# Altium PCB Cap.PcbDoc
Units mil, origin at the board's own origin, x right, y up, seen from the top; angles counter-clockwise.
Board outline 3395.86 x 3474.6 mil, 2 copper layers (Top Layer, Bottom Layer); 4 components, 1 nets, 24 pads, 0 vias.
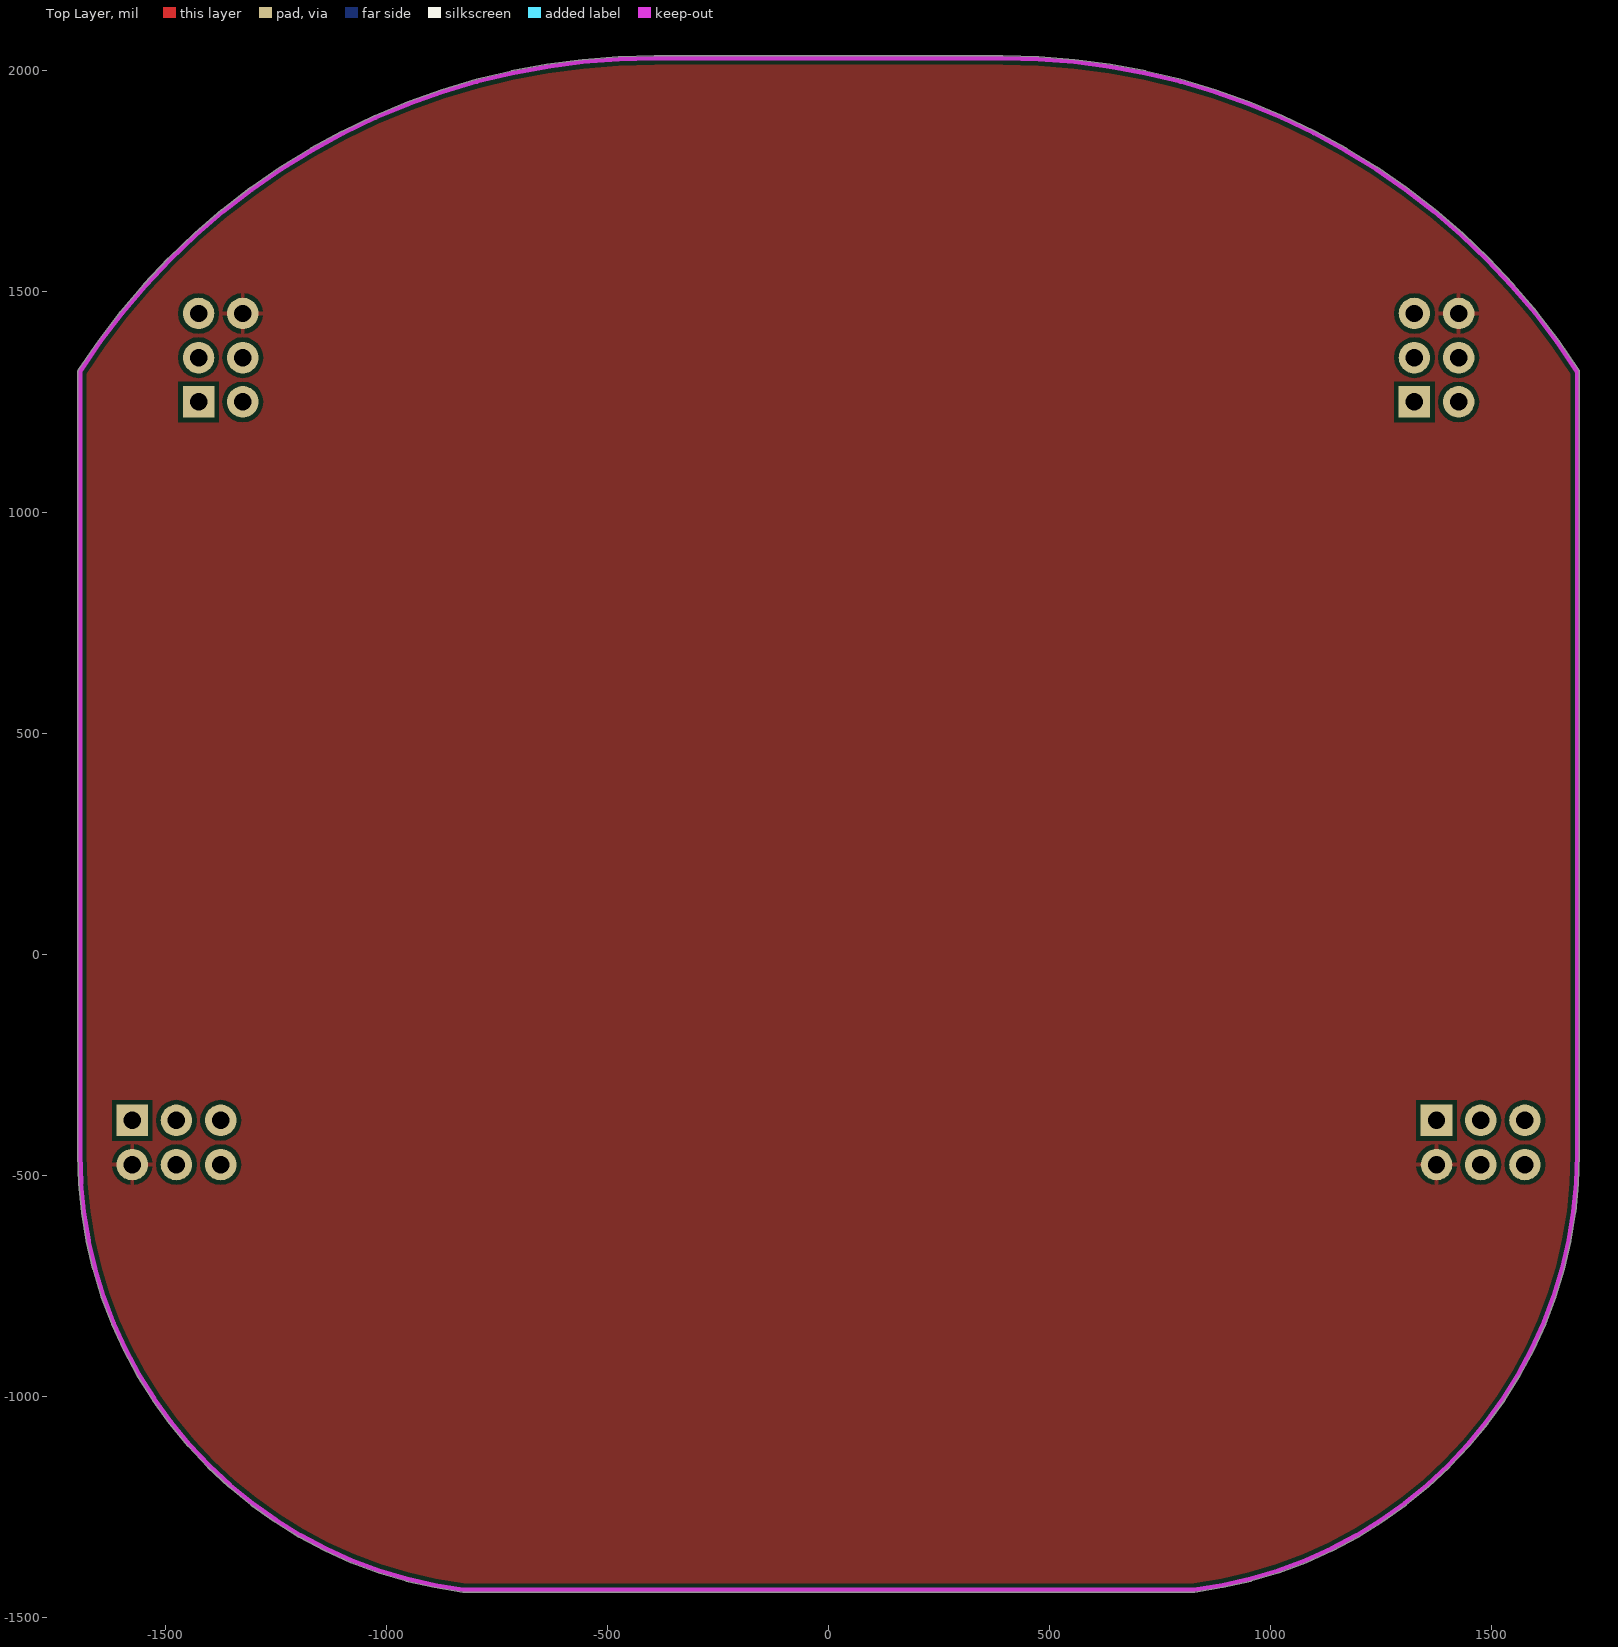
[diagram p0: Top Layer view]
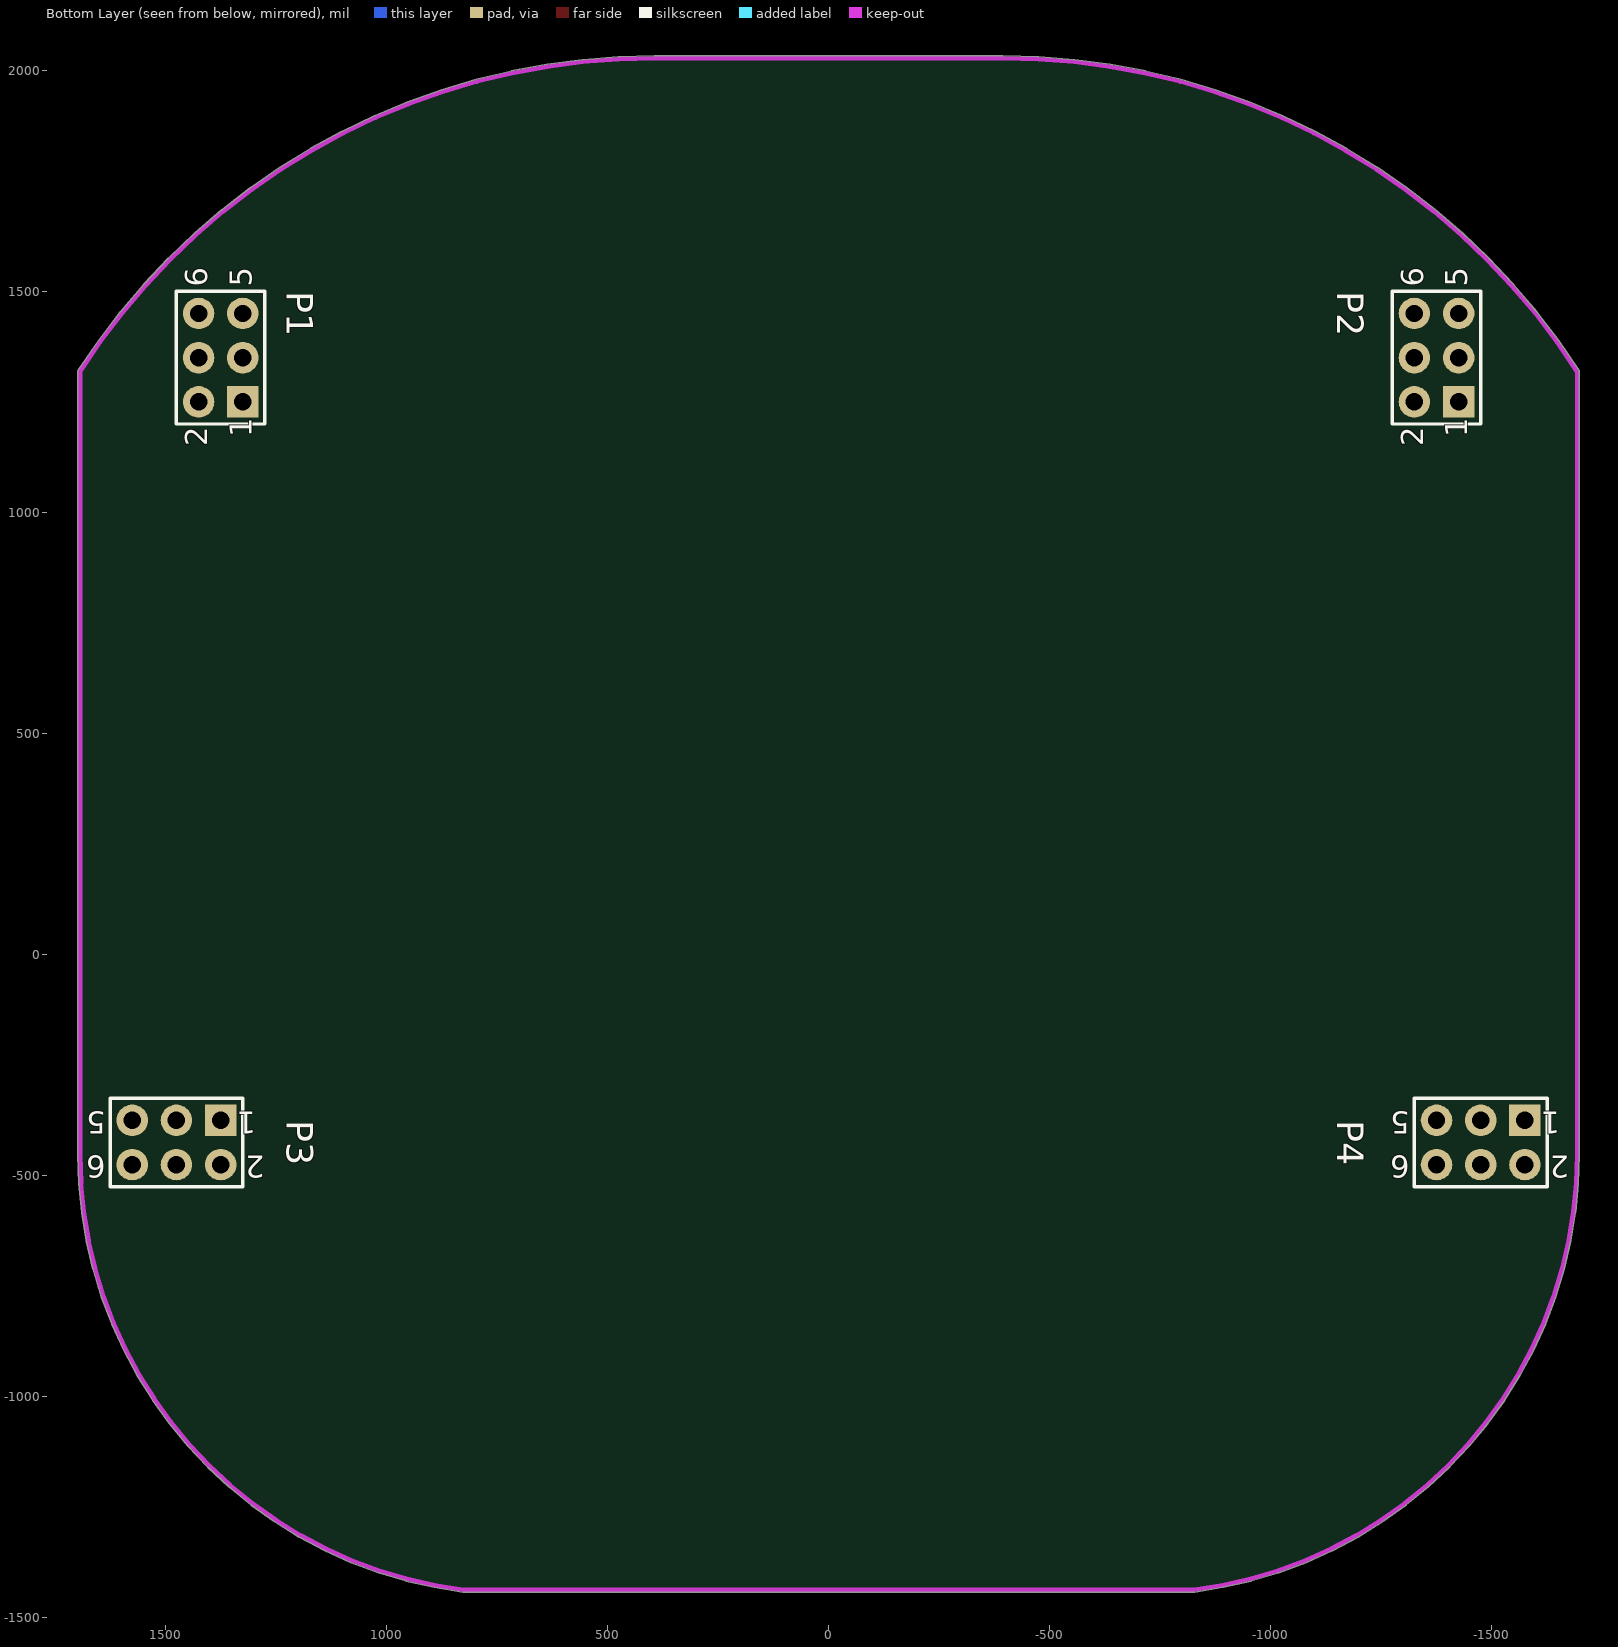
[diagram p1: Bottom Layer view, seen from below]

## Layer stack, top to bottom
Top Solder: solder mask 0.4, Solder Resist, Dk 3.5
Top Layer: signal copper 1.4
Dielectric 1: dielectric 12.6, FR-4, Dk 4.8
Bottom Layer: signal copper 1.4
Bottom Solder: solder mask 0.4, Solder Resist, Dk 3.5

## Board outline
334 vertices, not listed, extent -1697.93,-1442.02 1697.93,2032.57

## Design rules (kind name [scope] priority, off if disabled: settings)
Clearance [All] p1: gap=10
PolygonConnect [All] p1: connectstyle=Relief reliefconductorwidth=10 reliefentries=4 polygonreliefangle="90 Angle" airgapwidth=10
RoutingVias [All] p1: holewidth=28 width=50 viastyle="Through Hole" minholewidth=28 minwidth=50 maxholewidth=28 maxwidth=50
SolderMaskExpansion [All] p1: expansion=4
UnpouredPolygon [All] p1: allowunpoured=FALSE
Width [All] p1: maxlimit=10 minlimit=10 preferedwidth=10
29 further rules are at their usual default settings.

## Components (designator, comment, footprint, x,y, rotation, side; value= is the part's Value field where it differs from the comment)
P1 "Header 3X2" HDR2X3 1325,1250 r90 bottom
P2 "Header 3X2" HDR2X3 -1425,1250 r90 bottom
P3 "Header 3X2" HDR2X3 1375,-375 r0 bottom
P4 "Header 3X2" HDR2X3 -1575,-375 r0 bottom

## Footprints (in the part's own frame and the unit in brackets; to place one, negate y for a bottom-side part, rotate by r counter-clockwise, add the part's x,y. Pads: shape width x height; smd on the part's side, far side on the other; paste and mask are expansions set on the pad)
HDR2X3 [mm] "Connector; Header; 3x2 Position"
  rect 1.813x1.813 hole 1: 1(0,0)
  round 1.813 hole 1: 2(0,2.54) 3(2.54,0) 4(2.54,2.54) 5(5.08,0) 6(5.08,2.54)
  silkscreen extent -1.27,-1.27 6.35,3.81

## Part data
P1 P2 P3 P4: "Header, 3-Pin, Dual row"

## Nets (pads, with @x,y where several pads share a name; then routed paths per layer and width w, separated by ;. In a path a pad name is that pad's centre, name@x,y a point inside that pad or via, vN(x,y) a via of type N, cw(c..) or ccw(c..) an arc to the next point about the centre after c; other vN are vias at no path point)
GND: P1.6 P2.6 P3.2 P4.2
pads on no net: P1.1 P1.2 P1.3 P1.4 P1.5 P2.1 P2.2 P2.3 P2.4 P2.5 P3.1 P3.3 P3.4 P3.5 P3.6 P4.1 P4.3 P4.4 P4.5 P4.6

## Polygon pours and split planes (outlines as drawn)
GND on Top Layer "top layer-No Net" (solid, remove dead copper, pour order 3): -1800,2050 1800,2050 1800,-1500 -1800,-1500

## Keep-outs
Keep-Out Layer:
  lines w10: 1692.91,-255.9 1692.91,-255.91 ; 1692.91,-255.9 1692.91,1122.05 1692.91,1318.9 1647.16,1386 1597.95,1450.61 1545.42,1512.54 1489.7,1571.63 1430.95,1627.7 1369.34,1680.62 1305.03,1730.22 1238.21,1776.38 1169.05,1818.96 1097.75,1857.85 1024.51,1892.94 949.53,1924.13 873.01,1951.35 795.16,1974.5 716.21,1993.53 636.36,2008.39 555.85,2019.03 474.89,2025.43 393.7,2027.56 -393.7,2027.56 -474.89,2025.42 -555.85,2019.03 -636.36,2008.39 -716.21,1993.53 -795.16,1974.5 -873.01,1951.35 -949.53,1924.13 -1024.51,1892.94 -1097.75,1857.85 -1169.05,1818.96 -1238.21,1776.38 -1305.03,1730.22 -1369.34,1680.62 -1430.95,1627.7 -1489.7,1571.63 -1545.42,1512.54 -1597.95,1450.61 -1647.16,1386 -1692.91,1318.9 -1692.91,1122.05 -1692.91,-255.91 -1692.91,-452.76 -1690.78,-517.81 -1684.38,-582.58 -1673.76,-646.8 -1658.94,-710.18 -1640,-772.45 -1617.02,-833.35 -1590.1,-892.61 -1559.35,-949.97 -1524.91,-1005.2 -1486.92,-1058.05 -1445.54,-1108.3 -1400.97,-1155.73 -1353.37,-1200.13 -1302.97,-1241.31 -1249.98,-1279.11 -1194.63,-1313.35 -1137.14,-1343.88 -1077.79,-1370.58 -1016.8,-1393.34 -954.46,-1412.04 -891.03,-1426.62 -826.77,-1437.01 826.77,-1437.01 891.03,-1426.62 954.46,-1412.04 1016.8,-1393.34 1077.79,-1370.58 1137.15,-1343.88 1194.63,-1313.35 1249.98,-1279.11 1302.97,-1241.31 1353.37,-1200.13 1400.97,-1155.73 1445.55,-1108.3 1486.92,-1058.05 1524.91,-1005.2 1559.35,-949.97 1590.1,-892.61 1617.02,-833.35 1640,-772.45 1658.94,-710.18 1673.76,-646.8 1684.38,-582.58 1690.78,-517.81 1692.91,-452.76 1692.91,-255.91

## Text inside footprints (layer, text, board x,y; h text height)
P1: Bottom Overlay "6" at 1405,1510 h50 r270; Bottom Overlay "5" at 1305,1510 h50 r270; Bottom Overlay "2" at 1405,1150 h50 r270; Bottom Overlay "1" at 1305,1170 h50 r270
P2: Bottom Overlay "6" at -1345,1510 h50 r270; Bottom Overlay "5" at -1445,1510 h50 r270; Bottom Overlay "2" at -1345,1150 h50 r270; Bottom Overlay "1" at -1445,1170 h50 r270
P3: Bottom Overlay "6" at 1635,-455 h50 r180; Bottom Overlay "5" at 1635,-355 h50 r180; Bottom Overlay "2" at 1275,-455 h50 r180; Bottom Overlay "1" at 1295,-355 h50 r180
P4: Bottom Overlay "6" at -1315,-455 h50 r180; Bottom Overlay "5" at -1315,-355 h50 r180; Bottom Overlay "2" at -1675,-455 h50 r180; Bottom Overlay "1" at -1655,-355 h50 r180